# EAGLE board SparkFun-Blynk-Board-ESP8266_Panel_v10 (EAGLE 7.5.0), part 1 of 7
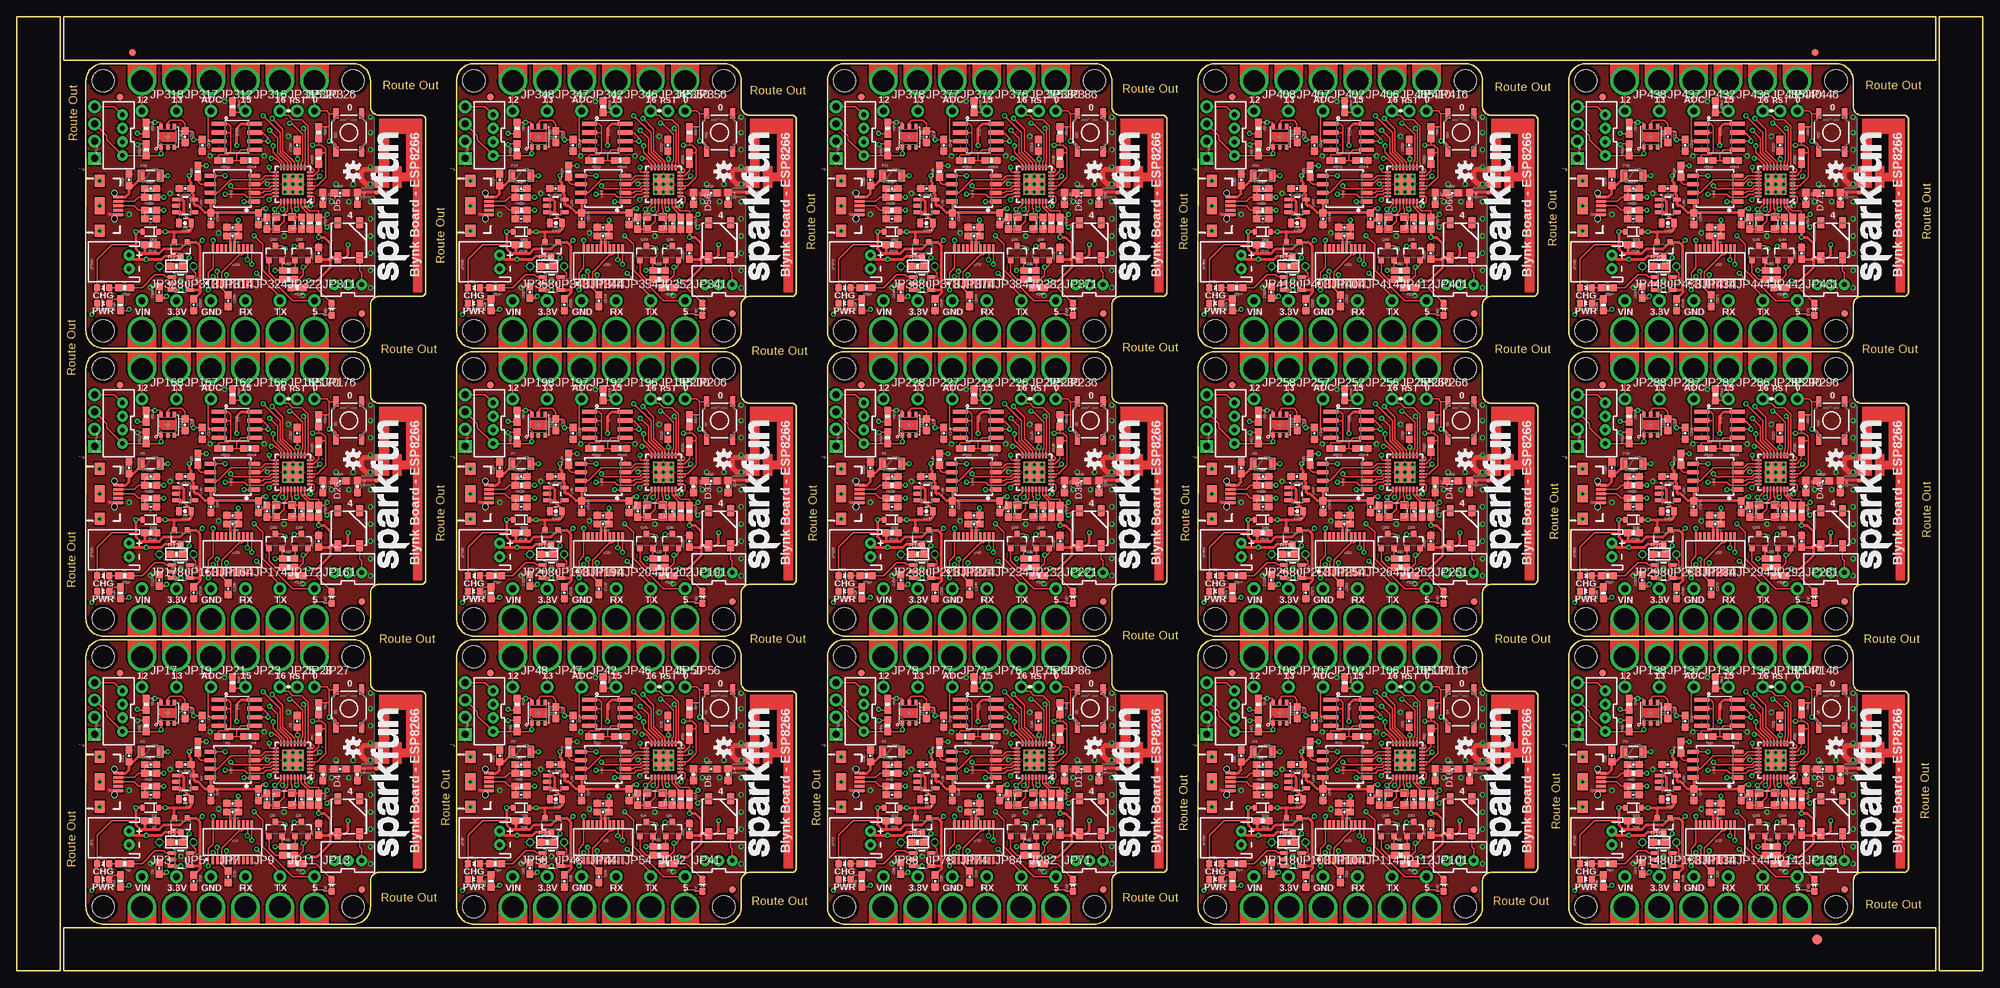
[diagram p0: board, top side]
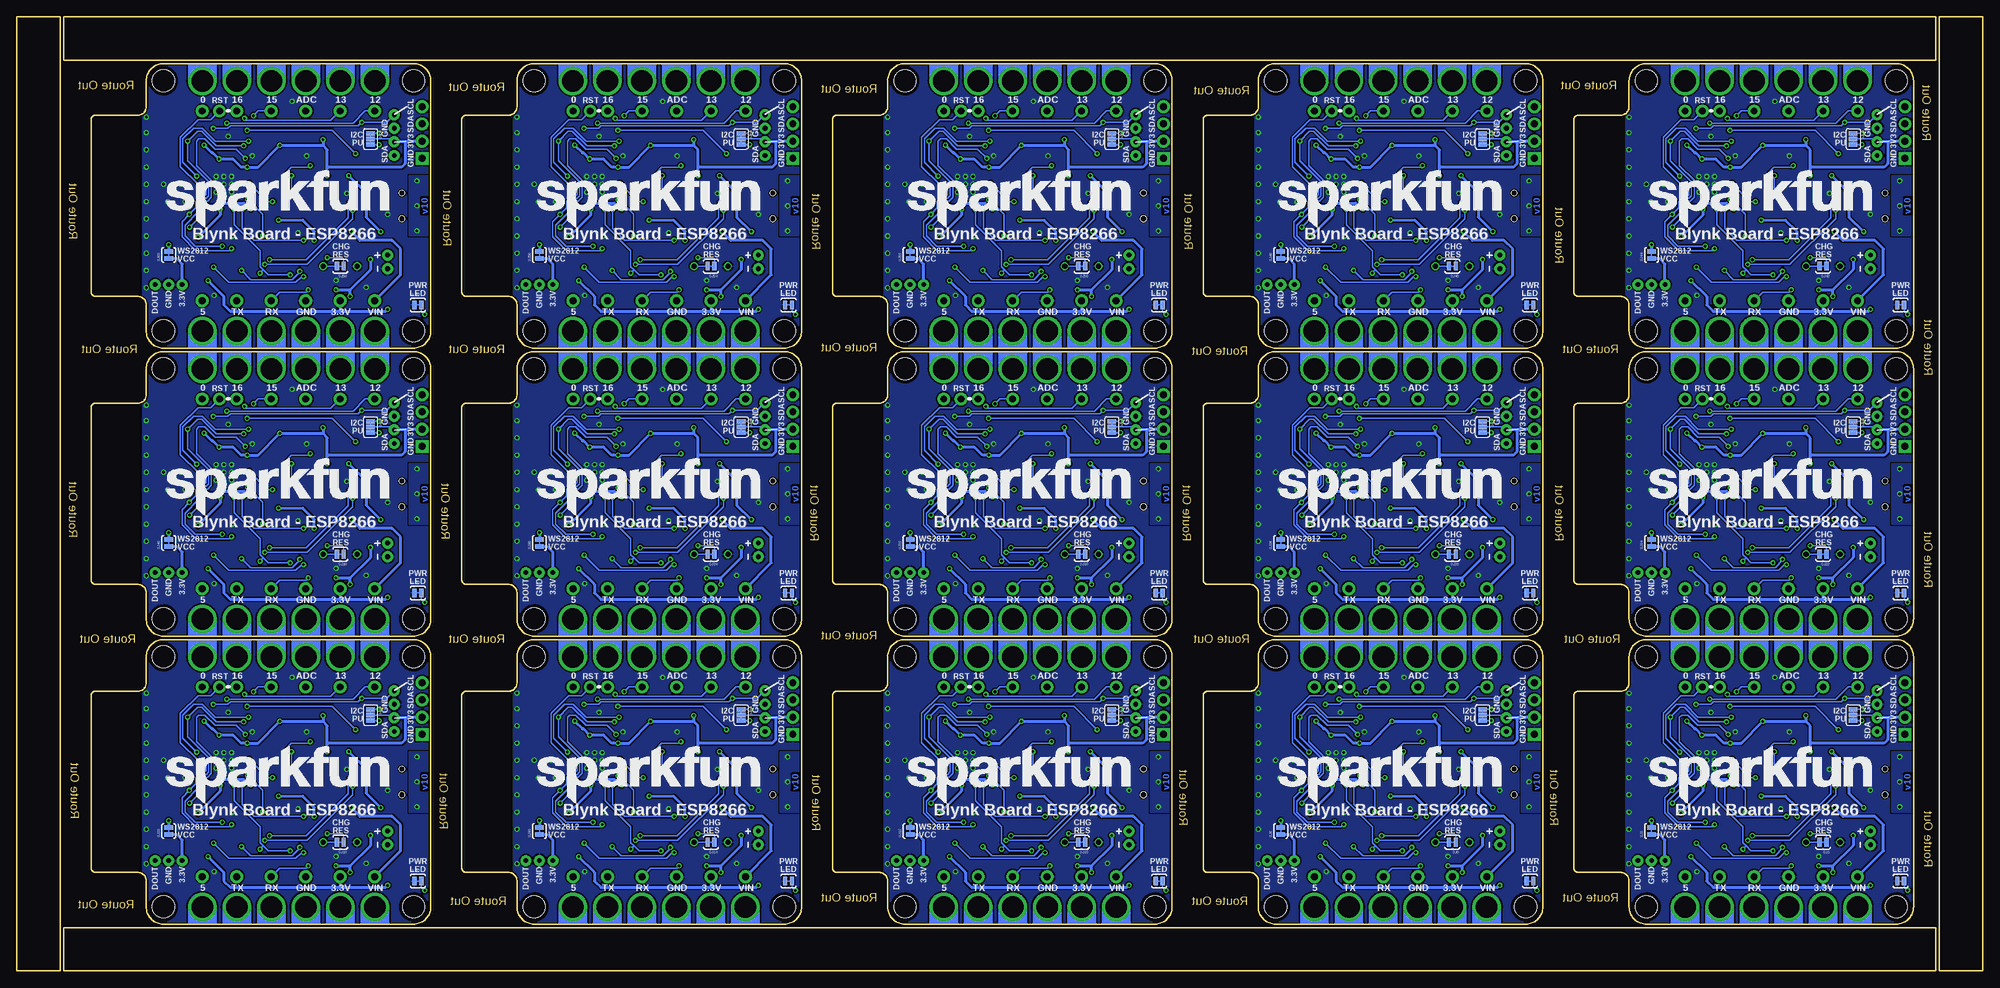
[diagram p1: board, bottom side, seen from below]

Size 289.56 x 140.46 mm. Coordinates in mm from the lower left corner, seen from the top.
Outline: 264 segments
Copper layers (1*16): Top 0.035mm / dielectric 1.5mm / Bottom 0.035mm
Design rules "SparkFun-2-layer-TIGHT": minimum track width 7mil, minimum drill 15mil, track to track 7mil, track to pad 7mil, pad to pad 7mil, via to via 7mil, smd to smd 7mil, copper to edge 7mil, drill to drill 7mil, minimum pad ring 7mil, minimum via ring 7mil, stop-mask expansion 4mil, vias tented up to drill 20mil, thermal gap 10mil

## Footprints (pad centres in the part's own frame; a part is rotated, then mirrored left to right if it is on the bottom)
0603-CAP = smd 1.1 x 1: 1 -0.85,0; 2 0.85,0
0805-CAP = smd 0.8 x 1.2: 1 -0.9,0; 2 0.9,0
LED-0603 = smd 1 x 1: A 0,-0.877; C 0,0.877
SOD-323 = smd 0.63 x 0.83: A 1.15,0; C -1.15,0
WS2812B = smd 1.651 x 1: 1 -2.577,1.6; 2 -2.577,-1.6; 3 2.577,-1.6; 4 2.577,1.6
TRACE_ANTENNA_2.4GHZ_25.7MM = smd 0.46 x 0.46: ANT 0,0.23 | smd 1 x 0.46: GND -1.18,0.23; GND2 -3.38,0.23
FIDUCIAL-1.5X3 = smd 1.5 x 1.5: 1 0,0
FIDUCIAL-1X2 = smd 1 x 1: 1 0,0
PTC-1206 = smd 1 x 1.8: 1 -1.4,0; 2 1.4,0
SO08 = smd 0.61 x 2.21: 1 -1.905,-2.616; 2 -0.635,-2.616; 3 0.635,-2.616; 4 1.905,-2.616; 5 1.905,2.616; 6 0.635,2.616; 7 -0.635,2.616; 8 -1.905,2.616
JST-2-PTH = drill 0.7 pad 1.6: 1 -1,0; 2 1,0
1X01_ALLIGATOR_3MM_HALF = drill 3.175: 1@2 0,0
1X01_NO_SILK = drill 1.016 pad 1.88: 1 0,0
JST-3-PTH-VERT = drill 0.7 pad 1.6: 1 -2,-0.55; 2 0,-0.55; 3 2,-0.55
USB-B-MICRO-SMD_V03 = smd 1.45 x 0.4: D+ 2.725,0; D- 2.725,0.65; GND 2.725,-1.3; ID 2.725,-0.65; VBUS 2.725,1.3 | smd 1.5 x 1.8: SHIELD1 0,3.685; SHIELD2 0,-3.685 | smd 1.5 x 2.5: SHIELD3 0,0 | hole 0.85: 2.2,1.9; 2.2,-1.9
JST-4-PTH-VERT = drill 0.7 pad 1.6: 1 -3,-0.55; 2 -1,-0.55; 3 1,-0.55; 4 3,-0.55
1X04_NO_SILK = drill 1.016 pad 1.88 square: 1 0,0 | drill 1.016 pad 1.88: 2 2.54,0; 3 5.08,0; 4 7.62,0
0603 = smd 1.1 x 1: 1 -0.85,0; 2 0.85,0
SOT23-3 = smd 0.8 x 0.9: 1 -0.95,-1; 2 0.95,-1; 3 0,1.1
SOT23-3@1 = smd 0.8 x 0.9: 1 -0.95,-1; 2 0.95,-1; 3 0,1.1
0603-RES = smd 1.1 x 1: 1 -0.85,0; 2 0.85,0
1/6W-RES = drill 0.762: 1 -2.5,0; 2 2.5,0
0603-RES@1 = smd 1.1 x 1: 1 -0.85,0; 2 0.85,0
TACTILE-SWITCH-SMD = smd 1.524 x 0.762: 1 -2.794,1.905; 2 2.794,1.905; 3 -2.794,-1.905; 4 2.794,-1.905
PAD-JUMPER-2-NC_BY_TRACE_YES_SILK = smd 0.635 x 1.27: 1 -0.508,0; 2 0.508,0
PAD-JUMPER-3-3OF3_NC_BY_TRACE_YES_SILK_FULL_BOX = smd 0.635 x 1.27: 1 -0.813,0; 2 0,0; 3 0.813,0
STAND-OFF = hole 3.302: 0,0
SOT23-5 = smd 0.55 x 1.2: 1 -0.95,-1.3; 2 0,-1.3; 3 0.95,-1.3; 4 0.95,1.3; 5 -0.95,1.3
QFN32 = smd 0.8 x 0.285: 1 -2.5,1.75; 2 -2.5,1.25; 3 -2.5,0.75; 4 -2.5,0.25; 5 -2.5,-0.25; 6 -2.5,-0.75; 7 -2.5,-1.25; 8 -2.5,-1.75; 17 2.5,-1.75; 18 2.5,-1.25; 19 2.5,-0.75; 20 2.5,-0.25; 21 2.5,0.25; 22 2.5,0.75; 23 2.5,1.25; 24 2.5,1.75 | smd 0.285 x 0.8: 9 -1.75,-2.5; 10 -1.25,-2.5; 11 -0.75,-2.5; 12 -0.25,-2.5; 13 0.25,-2.5; 14 0.75,-2.5; 15 1.25,-2.5; 16 1.75,-2.5; 25 1.75,2.5; 26 1.25,2.5; 27 0.75,2.5; 28 0.25,2.5; 29 -0.25,2.5; 30 -0.75,2.5; 31 -1.25,2.5; 32 -1.75,2.5 | smd 3.15 x 3.15: EP 0,0
SSOP20_L = smd 0.381 x 1.143: 1 -2.857,-2.68; 2 -2.223,-2.68; 3 -1.587,-2.68; 4 -0.953,-2.68; 5 -0.318,-2.68; 6 0.318,-2.68; 7 0.953,-2.68; 8 1.587,-2.68; 9 2.223,-2.68; 10 2.857,-2.68; 11 2.857,2.68; 12 2.223,2.68; 13 1.587,2.68; 14 0.953,2.68; 15 0.318,2.68; 16 -0.318,2.68; 17 -0.953,2.68; 18 -1.587,2.68; 19 -2.223,2.68; 20 -2.857,2.68
SOIC-8 = smd 0.61 x 1.702: 1 -1.905,-3.251; 2 -0.635,-3.251; 3 0.635,-3.251; 4 1.905,-3.251; 5 1.905,3.251; 6 0.635,3.251; 7 -0.635,3.251; 8 -1.905,3.251
SI7021 = smd 0.2 x 0.2: 7 0,0 | smd 0.8 x 0.5: DATA 1.5,-1; GND 1.5,0; NC@3 1.5,1; NC@4 -1.5,1; SCK -1.5,-1; VDD -1.5,0
CRYSTAL-SMD-3.2X2.5 = smd 1.2 x 1.1: 1 -1.175,-0.875; 2 1.175,-0.875; 3 1.175,0.875; 4 -1.175,0.875

## Placement (x,y rotation side)
C1  10uF  [0603-CAP]  35.56,25.91 270 top
C2  0.1uF  [0603-CAP]  41.27,36.7 90 top
C3  10pF  [0603-CAP]  36.83,25.27 270 top
C4  10pF  [0603-CAP]  41.91,25.27 90 top
C5  0.1uF  [0603-CAP]  27.3,36.7 270 top
C6  4.7uF  [0603-CAP]  20.95,15.11 90 top
C7  1.0uF  [0805-CAP]  24.77,25.27 180 top
C8  5.6pF  [0603-CAP]  47.62,29.72 0 top
C9  0.1uF  [0603-CAP]  44.45,20.83 90 top
C10  2.2uF  [0603-CAP]  24.77,30.35 180 top
C11  0.1uF  [0603-CAP]  16.51,31.62 90 top
C12  47pF  [0603-CAP]  19.68,30.35 0 top
C13  47pF  [0603-CAP]  19.68,25.91 0 top
C14  0.1uF  [0603-CAP]  31.75,23.37 180 top
C15  4.7uF  [0603-CAP]  31.75,24.64 180 top
C16  0.1uF  [0603-CAP]  31.11,13.84 270 top
C17  0.1uF  [0603-CAP]  28.57,25.91 270 top
C18  0.1uF  [0603-CAP]  24.77,37.97 270 top
C19  4.7uF  [0603-CAP]  26.04,13.21 270 top
C20  10uF  [0603-CAP]  90.17,25.91 270 top
C21  0.1uF  [0603-CAP]  83.19,25.91 270 top
C22  47pF  [0603-CAP]  74.3,25.91 0 top
C23  0.1uF  [0603-CAP]  86.36,23.37 180 top
C24  0.1uF  [0603-CAP]  85.72,13.84 270 top
C25  0.1uF  [0603-CAP]  95.89,36.7 90 top
C26  10pF  [0603-CAP]  91.44,25.27 270 top
C27  10pF  [0603-CAP]  96.52,25.27 90 top
C28  5.6pF  [0603-CAP]  102.23,29.72 0 top
C29  0.1uF  [0603-CAP]  71.12,31.62 90 top
C30  47pF  [0603-CAP]  74.3,30.35 0 top
C31  4.7uF  [0603-CAP]  86.36,24.64 180 top
C32  0.1uF  [0603-CAP]  79.38,37.97 270 top
C33  0.1uF  [0603-CAP]  99.06,20.83 90 top
C34  0.1uF  [0603-CAP]  81.92,36.7 270 top
C35  1.0uF  [0805-CAP]  79.38,25.27 180 top
C36  2.2uF  [0603-CAP]  79.38,30.35 180 top
C37  4.7uF  [0603-CAP]  75.56,15.11 90 top
C38  4.7uF  [0603-CAP]  80.64,13.21 270 top
C39  10uF  [0603-CAP]  144.78,25.91 270 top
C40  0.1uF  [0603-CAP]  137.79,25.91 270 top
C41  47pF  [0603-CAP]  128.91,25.91 0 top
C42  0.1uF  [0603-CAP]  140.97,23.37 180 top
C43  0.1uF  [0603-CAP]  140.34,13.84 270 top
C44  0.1uF  [0603-CAP]  150.5,36.7 90 top
C45  10pF  [0603-CAP]  146.05,25.27 270 top
C46  10pF  [0603-CAP]  151.13,25.27 90 top
C47  5.6pF  [0603-CAP]  156.84,29.72 0 top
C48  0.1uF  [0603-CAP]  125.73,31.62 90 top
C49  47pF  [0603-CAP]  128.91,30.35 0 top
C50  4.7uF  [0603-CAP]  140.97,24.64 180 top
C51  0.1uF  [0603-CAP]  133.99,37.97 270 top
C52  0.1uF  [0603-CAP]  153.67,20.83 90 top
C53  0.1uF  [0603-CAP]  136.53,36.7 270 top
C54  1.0uF  [0805-CAP]  133.99,25.27 180 top
C55  2.2uF  [0603-CAP]  133.99,30.35 180 top
C56  4.7uF  [0603-CAP]  130.18,15.11 90 top
C57  4.7uF  [0603-CAP]  135.25,13.21 270 top
C58  10uF  [0603-CAP]  199.39,25.91 270 top
C59  0.1uF  [0603-CAP]  192.41,25.91 270 top
C60  47pF  [0603-CAP]  183.51,25.91 0 top
C61  0.1uF  [0603-CAP]  195.58,23.37 180 top
C62  0.1uF  [0603-CAP]  194.94,13.84 270 top
C63  0.1uF  [0603-CAP]  205.1,36.7 90 top
C64  10pF  [0603-CAP]  200.66,25.27 270 top
C65  10pF  [0603-CAP]  205.74,25.27 90 top
C66  5.6pF  [0603-CAP]  211.46,29.72 0 top
C67  0.1uF  [0603-CAP]  180.34,31.62 90 top
C68  47pF  [0603-CAP]  183.51,30.35 0 top
C69  4.7uF  [0603-CAP]  195.58,24.64 180 top
C70  0.1uF  [0603-CAP]  188.59,37.97 270 top
C71  0.1uF  [0603-CAP]  208.28,20.83 90 top
C72  0.1uF  [0603-CAP]  191.13,36.7 270 top
C73  1.0uF  [0805-CAP]  188.59,25.27 180 top
C74  2.2uF  [0603-CAP]  188.59,30.35 180 top
C75  4.7uF  [0603-CAP]  184.78,15.11 90 top
C76  4.7uF  [0603-CAP]  189.87,13.21 270 top
C77  10uF  [0603-CAP]  254,25.91 270 top
C78  0.1uF  [0603-CAP]  247.01,25.91 270 top
C79  47pF  [0603-CAP]  238.12,25.91 0 top
C80  0.1uF  [0603-CAP]  250.19,23.37 180 top
C81  0.1uF  [0603-CAP]  249.56,13.84 270 top
C82  0.1uF  [0603-CAP]  259.71,36.7 90 top
C83  10pF  [0603-CAP]  255.27,25.27 270 top
C84  10pF  [0603-CAP]  260.35,25.27 90 top
C85  5.6pF  [0603-CAP]  266.06,29.72 0 top
C86  0.1uF  [0603-CAP]  234.95,31.62 90 top
C87  47pF  [0603-CAP]  238.12,30.35 0 top
C88  4.7uF  [0603-CAP]  250.19,24.64 180 top
C89  0.1uF  [0603-CAP]  243.21,37.97 270 top
C90  0.1uF  [0603-CAP]  262.89,20.83 90 top
C91  0.1uF  [0603-CAP]  245.75,36.7 270 top
C92  1.0uF  [0805-CAP]  243.21,25.27 180 top
C93  2.2uF  [0603-CAP]  243.21,30.35 180 top
C94  4.7uF  [0603-CAP]  239.4,15.11 90 top
C95  4.7uF  [0603-CAP]  244.47,13.21 270 top
C96  10uF  [0603-CAP]  35.56,68.33 270 top
C97  0.1uF  [0603-CAP]  28.57,68.33 270 top
C98  47pF  [0603-CAP]  19.68,68.33 0 top
C99  0.1uF  [0603-CAP]  31.75,65.79 180 top
C100  0.1uF  [0603-CAP]  31.11,56.26 270 top
C101  0.1uF  [0603-CAP]  41.27,79.12 90 top
C102  10pF  [0603-CAP]  36.83,67.69 270 top
C103  10pF  [0603-CAP]  41.91,67.69 90 top
C104  5.6pF  [0603-CAP]  47.62,72.14 0 top
C105  0.1uF  [0603-CAP]  16.51,74.04 90 top
C106  47pF  [0603-CAP]  19.68,72.77 0 top
C107  4.7uF  [0603-CAP]  31.75,67.06 180 top
C108  0.1uF  [0603-CAP]  24.77,80.39 270 top
C109  0.1uF  [0603-CAP]  44.45,63.25 90 top
C110  0.1uF  [0603-CAP]  27.3,79.12 270 top
C111  1.0uF  [0805-CAP]  24.77,67.69 180 top
C112  2.2uF  [0603-CAP]  24.77,72.77 180 top
C113  4.7uF  [0603-CAP]  20.95,57.53 90 top
C114  4.7uF  [0603-CAP]  26.04,55.63 270 top
C115  10uF  [0603-CAP]  90.17,68.33 270 top
C116  0.1uF  [0603-CAP]  83.19,68.33 270 top
C117  47pF  [0603-CAP]  74.3,68.33 0 top
C118  0.1uF  [0603-CAP]  86.36,65.79 180 top
C119  0.1uF  [0603-CAP]  85.72,56.26 270 top
C120  0.1uF  [0603-CAP]  95.89,79.12 90 top
C121  10pF  [0603-CAP]  91.44,67.69 270 top
C122  10pF  [0603-CAP]  96.52,67.69 90 top
C123  5.6pF  [0603-CAP]  102.23,72.14 0 top
C124  0.1uF  [0603-CAP]  71.12,74.04 90 top
C125  47pF  [0603-CAP]  74.3,72.77 0 top
C126  4.7uF  [0603-CAP]  86.36,67.06 180 top
C127  0.1uF  [0603-CAP]  79.38,80.39 270 top
C128  0.1uF  [0603-CAP]  99.06,63.25 90 top
C129  0.1uF  [0603-CAP]  81.92,79.12 270 top
C130  1.0uF  [0805-CAP]  79.38,67.69 180 top
C131  2.2uF  [0603-CAP]  79.38,72.77 180 top
C132  4.7uF  [0603-CAP]  75.56,57.53 90 top
C133  4.7uF  [0603-CAP]  80.64,55.63 270 top
C134  10uF  [0603-CAP]  144.78,68.33 270 top
C135  0.1uF  [0603-CAP]  137.79,68.33 270 top
C136  47pF  [0603-CAP]  128.91,68.33 0 top
C137  0.1uF  [0603-CAP]  140.97,65.79 180 top
C138  0.1uF  [0603-CAP]  140.34,56.26 270 top
C139  0.1uF  [0603-CAP]  150.5,79.12 90 top
C140  10pF  [0603-CAP]  146.05,67.69 270 top
C141  10pF  [0603-CAP]  151.13,67.69 90 top
C142  5.6pF  [0603-CAP]  156.84,72.14 0 top
C143  0.1uF  [0603-CAP]  125.73,74.04 90 top
C144  47pF  [0603-CAP]  128.91,72.77 0 top
C145  4.7uF  [0603-CAP]  140.97,67.06 180 top
C146  0.1uF  [0603-CAP]  133.99,80.39 270 top
C147  0.1uF  [0603-CAP]  153.67,63.25 90 top
C148  0.1uF  [0603-CAP]  136.53,79.12 270 top
C149  1.0uF  [0805-CAP]  133.99,67.69 180 top
C150  2.2uF  [0603-CAP]  133.99,72.77 180 top
C151  4.7uF  [0603-CAP]  130.18,57.53 90 top
C152  4.7uF  [0603-CAP]  135.25,55.63 270 top
C153  10uF  [0603-CAP]  199.39,68.33 270 top
C154  0.1uF  [0603-CAP]  192.41,68.33 270 top
C155  47pF  [0603-CAP]  183.51,68.33 0 top
C156  0.1uF  [0603-CAP]  195.58,65.79 180 top
C157  0.1uF  [0603-CAP]  194.94,56.26 270 top
C158  0.1uF  [0603-CAP]  205.1,79.12 90 top
C159  10pF  [0603-CAP]  200.66,67.69 270 top
C160  10pF  [0603-CAP]  205.74,67.69 90 top
C161  5.6pF  [0603-CAP]  211.46,72.14 0 top
C162  0.1uF  [0603-CAP]  180.34,74.04 90 top
C163  47pF  [0603-CAP]  183.51,72.77 0 top
C164  4.7uF  [0603-CAP]  195.58,67.06 180 top
C165  0.1uF  [0603-CAP]  188.59,80.39 270 top
C166  0.1uF  [0603-CAP]  208.28,63.25 90 top
C167  0.1uF  [0603-CAP]  191.13,79.12 270 top
C168  1.0uF  [0805-CAP]  188.59,67.69 180 top
C169  2.2uF  [0603-CAP]  188.59,72.77 180 top
C170  4.7uF  [0603-CAP]  184.78,57.53 90 top
C171  4.7uF  [0603-CAP]  189.87,55.63 270 top
C172  10uF  [0603-CAP]  254,68.33 270 top
C173  0.1uF  [0603-CAP]  247.01,68.33 270 top
C174  47pF  [0603-CAP]  238.12,68.33 0 top
C175  0.1uF  [0603-CAP]  250.19,65.79 180 top
C176  0.1uF  [0603-CAP]  249.56,56.26 270 top
C177  0.1uF  [0603-CAP]  259.71,79.12 90 top
C178  10pF  [0603-CAP]  255.27,67.69 270 top
C179  10pF  [0603-CAP]  260.35,67.69 90 top
C180  5.6pF  [0603-CAP]  266.06,72.14 0 top
C181  0.1uF  [0603-CAP]  234.95,74.04 90 top
C182  47pF  [0603-CAP]  238.12,72.77 0 top
C183  4.7uF  [0603-CAP]  250.19,67.06 180 top
C184  0.1uF  [0603-CAP]  243.21,80.39 270 top
C185  0.1uF  [0603-CAP]  262.89,63.25 90 top
C186  0.1uF  [0603-CAP]  245.75,79.12 270 top
C187  1.0uF  [0805-CAP]  243.21,67.69 180 top
C188  2.2uF  [0603-CAP]  243.21,72.77 180 top
C189  4.7uF  [0603-CAP]  239.4,57.53 90 top
C190  4.7uF  [0603-CAP]  244.47,55.63 270 top
C191  10uF  [0603-CAP]  35.56,110.74 270 top
C192  0.1uF  [0603-CAP]  28.57,110.74 270 top
C193  47pF  [0603-CAP]  19.68,110.74 0 top
C194  0.1uF  [0603-CAP]  31.75,108.2 180 top
C195  0.1uF  [0603-CAP]  31.11,98.68 270 top
C196  0.1uF  [0603-CAP]  41.27,121.54 90 top
C197  10pF  [0603-CAP]  36.83,110.11 270 top
C198  10pF  [0603-CAP]  41.91,110.11 90 top
C199  5.6pF  [0603-CAP]  47.62,114.55 0 top
C200  0.1uF  [0603-CAP]  16.51,116.46 90 top
C201  47pF  [0603-CAP]  19.68,115.19 0 top
C202  4.7uF  [0603-CAP]  31.75,109.47 180 top
C203  0.1uF  [0603-CAP]  24.77,122.81 270 top
C204  0.1uF  [0603-CAP]  44.45,105.66 90 top
C205  0.1uF  [0603-CAP]  27.3,121.54 270 top
C206  1.0uF  [0805-CAP]  24.77,110.11 180 top
C207  2.2uF  [0603-CAP]  24.77,115.19 180 top
C208  4.7uF  [0603-CAP]  20.95,99.95 90 top
C209  4.7uF  [0603-CAP]  26.04,98.04 270 top
C210  10uF  [0603-CAP]  90.17,110.74 270 top
C211  0.1uF  [0603-CAP]  83.19,110.74 270 top
C212  47pF  [0603-CAP]  74.3,110.74 0 top
C213  0.1uF  [0603-CAP]  86.36,108.2 180 top
C214  0.1uF  [0603-CAP]  85.72,98.68 270 top
C215  0.1uF  [0603-CAP]  95.89,121.54 90 top
C216  10pF  [0603-CAP]  91.44,110.11 270 top
C217  10pF  [0603-CAP]  96.52,110.11 90 top
C218  5.6pF  [0603-CAP]  102.23,114.55 0 top
C219  0.1uF  [0603-CAP]  71.12,116.46 90 top
C220  47pF  [0603-CAP]  74.3,115.19 0 top
C221  4.7uF  [0603-CAP]  86.36,109.47 180 top
C222  0.1uF  [0603-CAP]  79.38,122.81 270 top
C223  0.1uF  [0603-CAP]  99.06,105.66 90 top
C224  0.1uF  [0603-CAP]  81.92,121.54 270 top
C225  1.0uF  [0805-CAP]  79.38,110.11 180 top
C226  2.2uF  [0603-CAP]  79.38,115.19 180 top
C227  4.7uF  [0603-CAP]  75.56,99.95 90 top
C228  4.7uF  [0603-CAP]  80.64,98.04 270 top
C229  10uF  [0603-CAP]  144.78,110.74 270 top
C230  0.1uF  [0603-CAP]  137.79,110.74 270 top
C231  47pF  [0603-CAP]  128.91,110.74 0 top
C232  0.1uF  [0603-CAP]  140.97,108.2 180 top
C233  0.1uF  [0603-CAP]  140.34,98.68 270 top
C234  0.1uF  [0603-CAP]  150.5,121.54 90 top
C235  10pF  [0603-CAP]  146.05,110.11 270 top
C236  10pF  [0603-CAP]  151.13,110.11 90 top
C237  5.6pF  [0603-CAP]  156.84,114.55 0 top
C238  0.1uF  [0603-CAP]  125.73,116.46 90 top
C239  47pF  [0603-CAP]  128.91,115.19 0 top
C240  4.7uF  [0603-CAP]  140.97,109.47 180 top
C241  0.1uF  [0603-CAP]  133.99,122.81 270 top
C242  0.1uF  [0603-CAP]  153.67,105.66 90 top
C243  0.1uF  [0603-CAP]  136.53,121.54 270 top
C244  1.0uF  [0805-CAP]  133.99,110.11 180 top
C245  2.2uF  [0603-CAP]  133.99,115.19 180 top
C246  4.7uF  [0603-CAP]  130.18,99.95 90 top
C247  4.7uF  [0603-CAP]  135.25,98.04 270 top
C248  10uF  [0603-CAP]  199.39,110.74 270 top
C249  0.1uF  [0603-CAP]  192.41,110.74 270 top
C250  47pF  [0603-CAP]  183.51,110.74 0 top
C251  0.1uF  [0603-CAP]  195.58,108.2 180 top
C252  0.1uF  [0603-CAP]  194.94,98.68 270 top
C253  0.1uF  [0603-CAP]  205.1,121.54 90 top
C254  10pF  [0603-CAP]  200.66,110.11 270 top
C255  10pF  [0603-CAP]  205.74,110.11 90 top
C256  5.6pF  [0603-CAP]  211.46,114.55 0 top
C257  0.1uF  [0603-CAP]  180.34,116.46 90 top
C258  47pF  [0603-CAP]  183.51,115.19 0 top
C259  4.7uF  [0603-CAP]  195.58,109.47 180 top
C260  0.1uF  [0603-CAP]  188.59,122.81 270 top
C261  0.1uF  [0603-CAP]  208.28,105.66 90 top
C262  0.1uF  [0603-CAP]  191.13,121.54 270 top
C263  1.0uF  [0805-CAP]  188.59,110.11 180 top
C264  2.2uF  [0603-CAP]  188.59,115.19 180 top
C265  4.7uF  [0603-CAP]  184.78,99.95 90 top
C266  4.7uF  [0603-CAP]  189.87,98.04 270 top
C267  10uF  [0603-CAP]  254,110.74 270 top
C268  0.1uF  [0603-CAP]  247.01,110.74 270 top
C269  47pF  [0603-CAP]  238.12,110.74 0 top
C270  0.1uF  [0603-CAP]  250.19,108.2 180 top
C271  0.1uF  [0603-CAP]  249.56,98.68 270 top
C272  0.1uF  [0603-CAP]  259.71,121.54 90 top
C273  10pF  [0603-CAP]  255.27,110.11 270 top
C274  10pF  [0603-CAP]  260.35,110.11 90 top
C275  5.6pF  [0603-CAP]  266.06,114.55 0 top
C276  0.1uF  [0603-CAP]  234.95,116.46 90 top
C277  47pF  [0603-CAP]  238.12,115.19 0 top
C278  4.7uF  [0603-CAP]  250.19,109.47 180 top
C279  0.1uF  [0603-CAP]  243.21,122.81 270 top
C280  0.1uF  [0603-CAP]  262.89,105.66 90 top
C281  0.1uF  [0603-CAP]  245.75,121.54 270 top
C282  1.0uF  [0805-CAP]  243.21,110.11 180 top
C283  2.2uF  [0603-CAP]  243.21,115.19 180 top
C284  4.7uF  [0603-CAP]  239.4,99.95 90 top
C285  4.7uF  [0603-CAP]  244.47,98.04 270 top
D1  Yellow  [LED-0603]  12.7,15.75 270 top
D2  BAT20J  [SOD-323]  19.68,24 180 top
D3  BLUE  [LED-0603]  46.35,12.57 0 top
D4  WS2812  [WS2812B]  48.9,22.73 90 top
D5  RED  [LED-0603]  12.7,13.46 90 top
D6  WS2812  [WS2812B]  103.5,22.73 90 top
D7  BLUE  [LED-0603]  100.97,12.57 0 top
D8  BAT20J  [SOD-323]  74.3,24 180 top
D9  Yellow  [LED-0603]  67.31,15.75 270 top
D10  RED  [LED-0603]  67.31,13.46 90 top
D11  WS2812  [WS2812B]  158.12,22.73 90 top
D12  BLUE  [LED-0603]  155.57,12.57 0 top
D13  BAT20J  [SOD-323]  128.91,24 180 top
D14  Yellow  [LED-0603]  121.92,15.75 270 top
D15  RED  [LED-0603]  121.92,13.46 90 top
D16  WS2812  [WS2812B]  212.72,22.73 90 top
D17  BLUE  [LED-0603]  210.19,12.57 0 top
D18  BAT20J  [SOD-323]  183.51,24 180 top
D19  Yellow  [LED-0603]  176.53,15.75 270 top
D20  RED  [LED-0603]  176.53,13.46 90 top
D21  WS2812  [WS2812B]  267.33,22.73 90 top
D22  BLUE  [LED-0603]  264.8,12.57 0 top
D23  BAT20J  [SOD-323]  238.12,24 180 top
D24  Yellow  [LED-0603]  231.14,15.75 270 top
D25  RED  [LED-0603]  231.14,13.46 90 top
D26  WS2812  [WS2812B]  48.9,65.15 90 top
D27  BLUE  [LED-0603]  46.35,54.99 0 top
D28  BAT20J  [SOD-323]  19.68,66.42 180 top
D29  Yellow  [LED-0603]  12.7,58.17 270 top
D30  RED  [LED-0603]  12.7,55.88 90 top
D31  WS2812  [WS2812B]  103.5,65.15 90 top
D32  BLUE  [LED-0603]  100.97,54.99 0 top
D33  BAT20J  [SOD-323]  74.3,66.42 180 top
D34  Yellow  [LED-0603]  67.31,58.17 270 top
D35  RED  [LED-0603]  67.31,55.88 90 top
D36  WS2812  [WS2812B]  158.12,65.15 90 top
D37  BLUE  [LED-0603]  155.57,54.99 0 top
D38  BAT20J  [SOD-323]  128.91,66.42 180 top
D39  Yellow  [LED-0603]  121.92,58.17 270 top
D40  RED  [LED-0603]  121.92,55.88 90 top
D41  WS2812  [WS2812B]  212.72,65.15 90 top
D42  BLUE  [LED-0603]  210.19,54.99 0 top
D43  BAT20J  [SOD-323]  183.51,66.42 180 top
D44  Yellow  [LED-0603]  176.53,58.17 270 top
D45  RED  [LED-0603]  176.53,55.88 90 top
D46  WS2812  [WS2812B]  267.33,65.15 90 top
D47  BLUE  [LED-0603]  264.8,54.99 0 top
D48  BAT20J  [SOD-323]  238.12,66.42 180 top
D49  Yellow  [LED-0603]  231.14,58.17 270 top
D50  RED  [LED-0603]  231.14,55.88 90 top
D51  WS2812  [WS2812B]  48.9,107.57 90 top
D52  BLUE  [LED-0603]  46.35,97.41 0 top
D53  BAT20J  [SOD-323]  19.68,108.84 180 top
D54  Yellow  [LED-0603]  12.7,100.58 270 top
D55  RED  [LED-0603]  12.7,98.3 90 top
D56  WS2812  [WS2812B]  103.5,107.57 90 top
D57  BLUE  [LED-0603]  100.97,97.41 0 top
D58  BAT20J  [SOD-323]  74.3,108.84 180 top
D59  Yellow  [LED-0603]  67.31,100.58 270 top
D60  RED  [LED-0603]  67.31,98.3 90 top
D61  WS2812  [WS2812B]  158.12,107.57 90 top
D62  BLUE  [LED-0603]  155.57,97.41 0 top
D63  BAT20J  [SOD-323]  128.91,108.84 180 top
D64  Yellow  [LED-0603]  121.92,100.58 270 top
D65  RED  [LED-0603]  121.92,98.3 90 top
D66  WS2812  [WS2812B]  212.72,107.57 90 top
D67  BLUE  [LED-0603]  210.19,97.41 0 top
D68  BAT20J  [SOD-323]  183.51,108.84 180 top
D69  Yellow  [LED-0603]  176.53,100.58 270 top
D70  RED  [LED-0603]  176.53,98.3 90 top
D71  WS2812  [WS2812B]  267.33,107.57 90 top
D72  BLUE  [LED-0603]  264.8,97.41 0 top
D73  BAT20J  [SOD-323]  238.12,108.84 180 top
D74  Yellow  [LED-0603]  231.14,100.58 270 top
D75  RED  [LED-0603]  231.14,98.3 90 top
E1  ANTENNATRACE  [TRACE_ANTENNA_2.4GHZ_25.7MM]  52.7,29.78 270 top
E2  ANTENNATRACE  [TRACE_ANTENNA_2.4GHZ_25.7MM]  107.31,29.78 270 top
E3  ANTENNATRACE  [TRACE_ANTENNA_2.4GHZ_25.7MM]  161.93,29.78 270 top
E4  ANTENNATRACE  [TRACE_ANTENNA_2.4GHZ_25.7MM]  216.53,29.78 270 top
E5  ANTENNATRACE  [TRACE_ANTENNA_2.4GHZ_25.7MM]  271.14,29.78 270 top
E6  ANTENNATRACE  [TRACE_ANTENNA_2.4GHZ_25.7MM]  52.7,72.2 270 top
E7  ANTENNATRACE  [TRACE_ANTENNA_2.4GHZ_25.7MM]  107.31,72.2 270 top
E8  ANTENNATRACE  [TRACE_ANTENNA_2.4GHZ_25.7MM]  161.93,72.2 270 top
E9  ANTENNATRACE  [TRACE_ANTENNA_2.4GHZ_25.7MM]  216.53,72.2 270 top
E10  ANTENNATRACE  [TRACE_ANTENNA_2.4GHZ_25.7MM]  271.14,72.2 270 top
E11  ANTENNATRACE  [TRACE_ANTENNA_2.4GHZ_25.7MM]  52.7,114.62 270 top
E12  ANTENNATRACE  [TRACE_ANTENNA_2.4GHZ_25.7MM]  107.31,114.62 270 top
E13  ANTENNATRACE  [TRACE_ANTENNA_2.4GHZ_25.7MM]  161.93,114.62 270 top
E14  ANTENNATRACE  [TRACE_ANTENNA_2.4GHZ_25.7MM]  216.53,114.62 270 top
E15  ANTENNATRACE  [TRACE_ANTENNA_2.4GHZ_25.7MM]  271.14,114.62 270 top
E$1  [FIDUCIAL-1.5X3]  265.18,4.57 0 top
E$7  [FIDUCIAL-1X2]  264.92,135.25 90 top
E$8  [FIDUCIAL-1X2]  17.02,135.25 270 top
F1  500mA  [PTC-1206]  19.68,32.26 0 top
F2  500mA  [PTC-1206]  74.3,32.26 0 top
F3  500mA  [PTC-1206]  128.91,32.26 0 top
F4  500mA  [PTC-1206]  183.51,32.26 0 top
F5  500mA  [PTC-1206]  238.12,32.26 0 top
F6  500mA  [PTC-1206]  19.68,74.68 0 top
F7  500mA  [PTC-1206]  74.3,74.68 0 top
F8  500mA  [PTC-1206]  128.91,74.68 0 top
F9  500mA  [PTC-1206]  183.51,74.68 0 top
F10  500mA  [PTC-1206]  238.12,74.68 0 top
F11  500mA  [PTC-1206]  19.68,117.09 0 top
F12  500mA  [PTC-1206]  74.3,117.09 0 top
F13  500mA  [PTC-1206]  128.91,117.09 0 top
F14  500mA  [PTC-1206]  183.51,117.09 0 top
F15  500mA  [PTC-1206]  238.12,117.09 0 top
FID1  FIDUCIAL1X2  [FIDUCIAL-1X2]  50.8,11.94 0 top
FID2  FIDUCIAL1X2  [FIDUCIAL-1X2]  15.16,43.86 0 top
FID3  FIDUCIAL1X2  [FIDUCIAL-1X2]  105.41,11.94 0 top
FID4  FIDUCIAL1X2  [FIDUCIAL-1X2]  69.77,43.86 0 top
FID5  FIDUCIAL1X2  [FIDUCIAL-1X2]  160.02,11.94 0 top
FID6  FIDUCIAL1X2  [FIDUCIAL-1X2]  124.38,43.86 0 top
FID7  FIDUCIAL1X2  [FIDUCIAL-1X2]  214.63,11.94 0 top
FID8  FIDUCIAL1X2  [FIDUCIAL-1X2]  178.99,43.86 0 top
FID9  FIDUCIAL1X2  [FIDUCIAL-1X2]  269.24,11.94 0 top
FID10  FIDUCIAL1X2  [FIDUCIAL-1X2]  233.6,43.86 0 top
FID11  FIDUCIAL1X2  [FIDUCIAL-1X2]  50.8,54.36 0 top
FID12  FIDUCIAL1X2  [FIDUCIAL-1X2]  15.16,86.28 0 top
FID13  FIDUCIAL1X2  [FIDUCIAL-1X2]  105.41,54.36 0 top
FID14  FIDUCIAL1X2  [FIDUCIAL-1X2]  69.77,86.28 0 top
FID15  FIDUCIAL1X2  [FIDUCIAL-1X2]  160.02,54.36 0 top
FID16  FIDUCIAL1X2  [FIDUCIAL-1X2]  124.38,86.28 0 top
FID17  FIDUCIAL1X2  [FIDUCIAL-1X2]  214.63,54.36 0 top
FID18  FIDUCIAL1X2  [FIDUCIAL-1X2]  178.99,86.28 0 top
FID19  FIDUCIAL1X2  [FIDUCIAL-1X2]  269.24,54.36 0 top
FID20  FIDUCIAL1X2  [FIDUCIAL-1X2]  233.6,86.28 0 top
FID21  FIDUCIAL1X2  [FIDUCIAL-1X2]  50.8,96.77 0 top
FID22  FIDUCIAL1X2  [FIDUCIAL-1X2]  15.16,128.69 0 top
FID23  FIDUCIAL1X2  [FIDUCIAL-1X2]  105.41,96.77 0 top
FID24  FIDUCIAL1X2  [FIDUCIAL-1X2]  69.77,128.69 0 top
FID25  FIDUCIAL1X2  [FIDUCIAL-1X2]  160.02,96.77 0 top
FID26  FIDUCIAL1X2  [FIDUCIAL-1X2]  124.38,128.69 0 top
FID27  FIDUCIAL1X2  [FIDUCIAL-1X2]  214.63,96.77 0 top
FID28  FIDUCIAL1X2  [FIDUCIAL-1X2]  178.99,128.69 0 top
FID29  FIDUCIAL1X2  [FIDUCIAL-1X2]  269.24,96.77 0 top
FID30  FIDUCIAL1X2  [FIDUCIAL-1X2]  233.6,128.69 0 top
IC1  LMV358  [SO08]  32.38,37.97 270 top
IC2  LMV358  [SO08]  87,37.97 270 top
IC3  LMV358  [SO08]  141.6,37.97 270 top
IC4  LMV358  [SO08]  196.22,37.97 270 top
IC5  LMV358  [SO08]  250.82,37.97 270 top
IC6  LMV358  [SO08]  32.38,80.39 270 top
IC7  LMV358  [SO08]  87,80.39 270 top
IC8  LMV358  [SO08]  141.6,80.39 270 top
IC9  LMV358  [SO08]  196.22,80.39 270 top
IC10  LMV358  [SO08]  250.82,80.39 270 top
IC11  LMV358  [SO08]  32.38,122.81 270 top
IC12  LMV358  [SO08]  87,122.81 270 top
IC13  LMV358  [SO08]  141.6,122.81 270 top
IC14  LMV358  [SO08]  196.22,122.81 270 top
IC15  LMV358  [SO08]  250.82,122.81 270 top
JP1  LiPo  [JST-2-PTH]  16.51,19.56 90 top
JP2  [1X01_ALLIGATOR_3MM_HALF]  18.41,9.4 180 top
JP3  [1X01_NO_SILK]  18.41,13.84 0 top
JP4  [1X01_ALLIGATOR_3MM_HALF]  23.5,9.4 180 top
JP5  [1X01_NO_SILK]  23.5,13.84 0 top
JP6  [1X01_ALLIGATOR_3MM_HALF]  28.57,9.4 180 top
JP7  [1X01_NO_SILK]  28.57,13.84 0 top
JP8  [1X01_ALLIGATOR_3MM_HALF]  33.66,9.4 180 top
JP9  [1X01_NO_SILK]  33.66,13.84 0 top
JP10  [1X01_ALLIGATOR_3MM_HALF]  38.73,9.4 180 top
JP11  [1X01_NO_SILK]  38.73,13.84 0 top
JP12  [1X01_ALLIGATOR_3MM_HALF]  43.81,9.4 180 top
JP13  [1X01_NO_SILK]  43.81,13.84 0 top
JP14  [JST-3-PTH-VERT]  48.77,16.76 0 top
JP15  [USB-B-MICRO-SMD_V03]  12.19,27.81 0 top
JP16  [1X01_ALLIGATOR_3MM_HALF]  18.41,46.23 0 top
JP17  [1X01_NO_SILK]  18.41,41.78 0 top
JP18  [1X01_ALLIGATOR_3MM_HALF]  23.5,46.23 0 top
JP19  [1X01_NO_SILK]  23.5,41.78 0 top
JP20  [1X01_ALLIGATOR_3MM_HALF]  28.57,46.23 0 top
JP21  [1X01_NO_SILK]  28.57,41.78 0 top
JP22  [1X01_ALLIGATOR_3MM_HALF]  33.66,46.23 0 top
JP23  [1X01_NO_SILK]  33.66,41.78 0 top
JP24  [1X01_ALLIGATOR_3MM_HALF]  38.73,46.23 0 top
JP25  [1X01_NO_SILK]  38.73,41.78 0 top
JP26  [1X01_ALLIGATOR_3MM_HALF]  43.81,46.23 0 top
JP27  [1X01_NO_SILK]  43.81,41.78 0 top
JP28  [1X01_NO_SILK]  41.27,41.78 0 top
JP29  [JST-4-PTH-VERT]  14.99,38.23 90 top
JP30  [1X04_NO_SILK]  11.43,34.8 90 top
JP31  [USB-B-MICRO-SMD_V03]  66.8,27.81 0 top
JP32  [1X01_ALLIGATOR_3MM_HALF]  73.03,46.23 0 top
JP33  [1X01_ALLIGATOR_3MM_HALF]  78.11,46.23 0 top
JP34  [1X01_ALLIGATOR_3MM_HALF]  88.27,46.23 0 top
JP35  [1X01_ALLIGATOR_3MM_HALF]  93.34,46.23 0 top
JP36  [1X01_ALLIGATOR_3MM_HALF]  98.42,9.4 180 top
JP37  [1X01_ALLIGATOR_3MM_HALF]  83.19,46.23 0 top
JP38  [1X01_ALLIGATOR_3MM_HALF]  78.11,9.4 180 top
JP39  [1X01_ALLIGATOR_3MM_HALF]  83.19,9.4 180 top
JP40  [JST-3-PTH-VERT]  103.38,16.76 0 top
JP41  [1X01_NO_SILK]  98.42,13.84 0 top
JP42  [1X01_NO_SILK]  83.19,41.78 0 top
JP43  [1X01_NO_SILK]  78.11,13.84 0 top
JP44  [1X01_NO_SILK]  83.19,13.84 0 top
JP45  [1X01_NO_SILK]  93.34,41.78 0 top
JP46  [1X01_NO_SILK]  88.27,41.78 0 top
JP47  [1X01_NO_SILK]  78.11,41.78 0 top
JP48  [1X01_NO_SILK]  73.03,41.78 0 top
JP49  LiPo  [JST-2-PTH]  71.12,19.56 90 top
JP50  [1X01_NO_SILK]  95.89,41.78 0 top
JP51  [1X01_ALLIGATOR_3MM_HALF]  93.34,9.4 180 top
JP52  [1X01_NO_SILK]  93.34,13.84 0 top
JP53  [1X01_ALLIGATOR_3MM_HALF]  88.27,9.4 180 top
JP54  [1X01_NO_SILK]  88.27,13.84 0 top
JP55  [1X01_ALLIGATOR_3MM_HALF]  98.42,46.23 0 top
JP56  [1X01_NO_SILK]  98.42,41.78 0 top
JP57  [1X01_ALLIGATOR_3MM_HALF]  73.03,9.4 180 top
JP58  [1X01_NO_SILK]  73.03,13.84 0 top
JP59  [1X04_NO_SILK]  66.04,34.8 90 top
JP60  [JST-4-PTH-VERT]  69.6,38.23 90 top
JP61  [USB-B-MICRO-SMD_V03]  121.41,27.81 0 top
JP62  [1X01_ALLIGATOR_3MM_HALF]  127.64,46.23 0 top
JP63  [1X01_ALLIGATOR_3MM_HALF]  132.72,46.23 0 top
JP64  [1X01_ALLIGATOR_3MM_HALF]  142.88,46.23 0 top
JP65  [1X01_ALLIGATOR_3MM_HALF]  147.96,46.23 0 top
JP66  [1X01_ALLIGATOR_3MM_HALF]  153.03,9.4 180 top
JP67  [1X01_ALLIGATOR_3MM_HALF]  137.79,46.23 0 top
JP68  [1X01_ALLIGATOR_3MM_HALF]  132.72,9.4 180 top
JP69  [1X01_ALLIGATOR_3MM_HALF]  137.79,9.4 180 top
JP70  [JST-3-PTH-VERT]  157.99,16.76 0 top
JP71  [1X01_NO_SILK]  153.03,13.84 0 top
JP72  [1X01_NO_SILK]  137.79,41.78 0 top
JP73  [1X01_NO_SILK]  132.72,13.84 0 top
JP74  [1X01_NO_SILK]  137.79,13.84 0 top
JP75  [1X01_NO_SILK]  147.96,41.78 0 top
JP76  [1X01_NO_SILK]  142.88,41.78 0 top
JP77  [1X01_NO_SILK]  132.72,41.78 0 top
JP78  [1X01_NO_SILK]  127.64,41.78 0 top
JP79  LiPo  [JST-2-PTH]  125.73,19.56 90 top
JP80  [1X01_NO_SILK]  150.5,41.78 0 top
JP81  [1X01_ALLIGATOR_3MM_HALF]  147.96,9.4 180 top
JP82  [1X01_NO_SILK]  147.96,13.84 0 top
JP83  [1X01_ALLIGATOR_3MM_HALF]  142.88,9.4 180 top
JP84  [1X01_NO_SILK]  142.88,13.84 0 top
JP85  [1X01_ALLIGATOR_3MM_HALF]  153.03,46.23 0 top
JP86  [1X01_NO_SILK]  153.03,41.78 0 top
JP87  [1X01_ALLIGATOR_3MM_HALF]  127.64,9.4 180 top
JP88  [1X01_NO_SILK]  127.64,13.84 0 top
JP89  [1X04_NO_SILK]  120.65,34.8 90 top
JP90  [JST-4-PTH-VERT]  124.21,38.23 90 top
JP91  [USB-B-MICRO-SMD_V03]  176.02,27.81 0 top
JP92  [1X01_ALLIGATOR_3MM_HALF]  182.25,46.23 0 top
JP93  [1X01_ALLIGATOR_3MM_HALF]  187.32,46.23 0 top
JP94  [1X01_ALLIGATOR_3MM_HALF]  197.49,46.23 0 top
JP95  [1X01_ALLIGATOR_3MM_HALF]  202.56,46.23 0 top
JP96  [1X01_ALLIGATOR_3MM_HALF]  207.65,9.4 180 top
JP97  [1X01_ALLIGATOR_3MM_HALF]  192.41,46.23 0 top
JP98  [1X01_ALLIGATOR_3MM_HALF]  187.32,9.4 180 top
JP99  [1X01_ALLIGATOR_3MM_HALF]  192.41,9.4 180 top
JP100  [JST-3-PTH-VERT]  212.6,16.76 0 top
JP101  [1X01_NO_SILK]  207.65,13.84 0 top
JP102  [1X01_NO_SILK]  192.41,41.78 0 top
JP103  [1X01_NO_SILK]  187.32,13.84 0 top
JP104  [1X01_NO_SILK]  192.41,13.84 0 top
JP105  [1X01_NO_SILK]  202.56,41.78 0 top
JP106  [1X01_NO_SILK]  197.49,41.78 0 top
JP107  [1X01_NO_SILK]  187.32,41.78 0 top
JP108  [1X01_NO_SILK]  182.25,41.78 0 top
JP109  LiPo  [JST-2-PTH]  180.34,19.56 90 top
JP110  [1X01_NO_SILK]  205.1,41.78 0 top
JP111  [1X01_ALLIGATOR_3MM_HALF]  202.56,9.4 180 top
JP112  [1X01_NO_SILK]  202.56,13.84 0 top
JP113  [1X01_ALLIGATOR_3MM_HALF]  197.49,9.4 180 top
JP114  [1X01_NO_SILK]  197.49,13.84 0 top
JP115  [1X01_ALLIGATOR_3MM_HALF]  207.65,46.23 0 top
JP116  [1X01_NO_SILK]  207.65,41.78 0 top
JP117  [1X01_ALLIGATOR_3MM_HALF]  182.25,9.4 180 top
JP118  [1X01_NO_SILK]  182.25,13.84 0 top
JP119  [1X04_NO_SILK]  175.26,34.8 90 top
JP120  [JST-4-PTH-VERT]  178.82,38.23 90 top
JP121  [USB-B-MICRO-SMD_V03]  230.63,27.81 0 top
JP122  [1X01_ALLIGATOR_3MM_HALF]  236.85,46.23 0 top
JP123  [1X01_ALLIGATOR_3MM_HALF]  241.94,46.23 0 top
JP124  [1X01_ALLIGATOR_3MM_HALF]  252.09,46.23 0 top
JP125  [1X01_ALLIGATOR_3MM_HALF]  257.18,46.23 0 top
JP126  [1X01_ALLIGATOR_3MM_HALF]  262.25,9.4 180 top
JP127  [1X01_ALLIGATOR_3MM_HALF]  247.01,46.23 0 top
JP128  [1X01_ALLIGATOR_3MM_HALF]  241.94,9.4 180 top
JP129  [1X01_ALLIGATOR_3MM_HALF]  247.01,9.4 180 top
JP130  [JST-3-PTH-VERT]  267.21,16.76 0 top
JP131  [1X01_NO_SILK]  262.25,13.84 0 top
JP132  [1X01_NO_SILK]  247.01,41.78 0 top
JP133  [1X01_NO_SILK]  241.94,13.84 0 top
JP134  [1X01_NO_SILK]  247.01,13.84 0 top
JP135  [1X01_NO_SILK]  257.18,41.78 0 top
JP136  [1X01_NO_SILK]  252.09,41.78 0 top
JP137  [1X01_NO_SILK]  241.94,41.78 0 top
JP138  [1X01_NO_SILK]  236.85,41.78 0 top
JP139  LiPo  [JST-2-PTH]  234.95,19.56 90 top
JP140  [1X01_NO_SILK]  259.71,41.78 0 top
JP141  [1X01_ALLIGATOR_3MM_HALF]  257.18,9.4 180 top
JP142  [1X01_NO_SILK]  257.18,13.84 0 top
JP143  [1X01_ALLIGATOR_3MM_HALF]  252.09,9.4 180 top
JP144  [1X01_NO_SILK]  252.09,13.84 0 top
JP145  [1X01_ALLIGATOR_3MM_HALF]  262.25,46.23 0 top
JP146  [1X01_NO_SILK]  262.25,41.78 0 top
JP147  [1X01_ALLIGATOR_3MM_HALF]  236.85,9.4 180 top
JP148  [1X01_NO_SILK]  236.85,13.84 0 top
JP149  [1X04_NO_SILK]  229.87,34.8 90 top
JP150  [JST-4-PTH-VERT]  233.43,38.23 90 top
JP151  [USB-B-MICRO-SMD_V03]  12.19,70.23 0 top
JP152  [1X01_ALLIGATOR_3MM_HALF]  18.41,88.65 0 top
JP153  [1X01_ALLIGATOR_3MM_HALF]  23.5,88.65 0 top
JP154  [1X01_ALLIGATOR_3MM_HALF]  33.66,88.65 0 top
JP155  [1X01_ALLIGATOR_3MM_HALF]  38.73,88.65 0 top
JP156  [1X01_ALLIGATOR_3MM_HALF]  43.81,51.82 180 top
JP157  [1X01_ALLIGATOR_3MM_HALF]  28.57,88.65 0 top
JP158  [1X01_ALLIGATOR_3MM_HALF]  23.5,51.82 180 top
JP159  [1X01_ALLIGATOR_3MM_HALF]  28.57,51.82 180 top
JP160  [JST-3-PTH-VERT]  48.77,59.18 0 top
JP161  [1X01_NO_SILK]  43.81,56.26 0 top
JP162  [1X01_NO_SILK]  28.57,84.2 0 top
JP163  [1X01_NO_SILK]  23.5,56.26 0 top
JP164  [1X01_NO_SILK]  28.57,56.26 0 top
JP165  [1X01_NO_SILK]  38.73,84.2 0 top
JP166  [1X01_NO_SILK]  33.66,84.2 0 top
JP167  [1X01_NO_SILK]  23.5,84.2 0 top
JP168  [1X01_NO_SILK]  18.41,84.2 0 top
JP169  LiPo  [JST-2-PTH]  16.51,61.98 90 top
JP170  [1X01_NO_SILK]  41.27,84.2 0 top
JP171  [1X01_ALLIGATOR_3MM_HALF]  38.73,51.82 180 top
JP172  [1X01_NO_SILK]  38.73,56.26 0 top
JP173  [1X01_ALLIGATOR_3MM_HALF]  33.66,51.82 180 top
JP174  [1X01_NO_SILK]  33.66,56.26 0 top
JP175  [1X01_ALLIGATOR_3MM_HALF]  43.81,88.65 0 top
JP176  [1X01_NO_SILK]  43.81,84.2 0 top
JP177  [1X01_ALLIGATOR_3MM_HALF]  18.41,51.82 180 top
JP178  [1X01_NO_SILK]  18.41,56.26 0 top
JP179  [1X04_NO_SILK]  11.43,77.22 90 top
JP180  [JST-4-PTH-VERT]  14.99,80.64 90 top
JP181  [USB-B-MICRO-SMD_V03]  66.8,70.23 0 top
JP182  [1X01_ALLIGATOR_3MM_HALF]  73.03,88.65 0 top
JP183  [1X01_ALLIGATOR_3MM_HALF]  78.11,88.65 0 top
JP184  [1X01_ALLIGATOR_3MM_HALF]  88.27,88.65 0 top
JP185  [1X01_ALLIGATOR_3MM_HALF]  93.34,88.65 0 top
JP186  [1X01_ALLIGATOR_3MM_HALF]  98.42,51.82 180 top
JP187  [1X01_ALLIGATOR_3MM_HALF]  83.19,88.65 0 top
JP188  [1X01_ALLIGATOR_3MM_HALF]  78.11,51.82 180 top
JP189  [1X01_ALLIGATOR_3MM_HALF]  83.19,51.82 180 top
JP190  [JST-3-PTH-VERT]  103.38,59.18 0 top
JP191  [1X01_NO_SILK]  98.42,56.26 0 top
JP192  [1X01_NO_SILK]  83.19,84.2 0 top
JP193  [1X01_NO_SILK]  78.11,56.26 0 top
JP194  [1X01_NO_SILK]  83.19,56.26 0 top
JP195  [1X01_NO_SILK]  93.34,84.2 0 top
JP196  [1X01_NO_SILK]  88.27,84.2 0 top
JP197  [1X01_NO_SILK]  78.11,84.2 0 top
JP198  [1X01_NO_SILK]  73.03,84.2 0 top
JP199  LiPo  [JST-2-PTH]  71.12,61.98 90 top
JP200  [1X01_NO_SILK]  95.89,84.2 0 top
JP201  [1X01_ALLIGATOR_3MM_HALF]  93.34,51.82 180 top
JP202  [1X01_NO_SILK]  93.34,56.26 0 top
JP203  [1X01_ALLIGATOR_3MM_HALF]  88.27,51.82 180 top
JP204  [1X01_NO_SILK]  88.27,56.26 0 top
JP205  [1X01_ALLIGATOR_3MM_HALF]  98.42,88.65 0 top
JP206  [1X01_NO_SILK]  98.42,84.2 0 top
JP207  [1X01_ALLIGATOR_3MM_HALF]  73.03,51.82 180 top
JP208  [1X01_NO_SILK]  73.03,56.26 0 top
JP209  [1X04_NO_SILK]  66.04,77.22 90 top
JP210  [JST-4-PTH-VERT]  69.6,80.64 90 top
JP211  [USB-B-MICRO-SMD_V03]  121.41,70.23 0 top
JP212  [1X01_ALLIGATOR_3MM_HALF]  127.64,88.65 0 top
JP213  [1X01_ALLIGATOR_3MM_HALF]  132.72,88.65 0 top
JP214  [1X01_ALLIGATOR_3MM_HALF]  142.88,88.65 0 top
JP215  [1X01_ALLIGATOR_3MM_HALF]  147.96,88.65 0 top
JP216  [1X01_ALLIGATOR_3MM_HALF]  153.03,51.82 180 top
JP217  [1X01_ALLIGATOR_3MM_HALF]  137.79,88.65 0 top
JP218  [1X01_ALLIGATOR_3MM_HALF]  132.72,51.82 180 top
JP219  [1X01_ALLIGATOR_3MM_HALF]  137.79,51.82 180 top
JP220  [JST-3-PTH-VERT]  157.99,59.18 0 top
JP221  [1X01_NO_SILK]  153.03,56.26 0 top
JP222  [1X01_NO_SILK]  137.79,84.2 0 top
JP223  [1X01_NO_SILK]  132.72,56.26 0 top
JP224  [1X01_NO_SILK]  137.79,56.26 0 top
JP225  [1X01_NO_SILK]  147.96,84.2 0 top
JP226  [1X01_NO_SILK]  142.88,84.2 0 top
JP227  [1X01_NO_SILK]  132.72,84.2 0 top
JP228  [1X01_NO_SILK]  127.64,84.2 0 top
JP229  LiPo  [JST-2-PTH]  125.73,61.98 90 top
JP230  [1X01_NO_SILK]  150.5,84.2 0 top
JP231  [1X01_ALLIGATOR_3MM_HALF]  147.96,51.82 180 top
JP232  [1X01_NO_SILK]  147.96,56.26 0 top
JP233  [1X01_ALLIGATOR_3MM_HALF]  142.88,51.82 180 top
JP234  [1X01_NO_SILK]  142.88,56.26 0 top
JP235  [1X01_ALLIGATOR_3MM_HALF]  153.03,88.65 0 top
JP236  [1X01_NO_SILK]  153.03,84.2 0 top
JP237  [1X01_ALLIGATOR_3MM_HALF]  127.64,51.82 180 top
JP238  [1X01_NO_SILK]  127.64,56.26 0 top
JP239  [1X04_NO_SILK]  120.65,77.22 90 top
JP240  [JST-4-PTH-VERT]  124.21,80.64 90 top
JP241  [USB-B-MICRO-SMD_V03]  176.02,70.23 0 top
JP242  [1X01_ALLIGATOR_3MM_HALF]  182.25,88.65 0 top
JP243  [1X01_ALLIGATOR_3MM_HALF]  187.32,88.65 0 top
JP244  [1X01_ALLIGATOR_3MM_HALF]  197.49,88.65 0 top
JP245  [1X01_ALLIGATOR_3MM_HALF]  202.56,88.65 0 top
JP246  [1X01_ALLIGATOR_3MM_HALF]  207.65,51.82 180 top
JP247  [1X01_ALLIGATOR_3MM_HALF]  192.41,88.65 0 top
JP248  [1X01_ALLIGATOR_3MM_HALF]  187.32,51.82 180 top
JP249  [1X01_ALLIGATOR_3MM_HALF]  192.41,51.82 180 top
JP250  [JST-3-PTH-VERT]  212.6,59.18 0 top
JP251  [1X01_NO_SILK]  207.65,56.26 0 top
JP252  [1X01_NO_SILK]  192.41,84.2 0 top
JP253  [1X01_NO_SILK]  187.32,56.26 0 top
JP254  [1X01_NO_SILK]  192.41,56.26 0 top
JP255  [1X01_NO_SILK]  202.56,84.2 0 top
JP256  [1X01_NO_SILK]  197.49,84.2 0 top
JP257  [1X01_NO_SILK]  187.32,84.2 0 top
JP258  [1X01_NO_SILK]  182.25,84.2 0 top
JP259  LiPo  [JST-2-PTH]  180.34,61.98 90 top
JP260  [1X01_NO_SILK]  205.1,84.2 0 top
JP261  [1X01_ALLIGATOR_3MM_HALF]  202.56,51.82 180 top
JP262  [1X01_NO_SILK]  202.56,56.26 0 top
JP263  [1X01_ALLIGATOR_3MM_HALF]  197.49,51.82 180 top
JP264  [1X01_NO_SILK]  197.49,56.26 0 top
JP265  [1X01_ALLIGATOR_3MM_HALF]  207.65,88.65 0 top
JP266  [1X01_NO_SILK]  207.65,84.2 0 top
JP267  [1X01_ALLIGATOR_3MM_HALF]  182.25,51.82 180 top
JP268  [1X01_NO_SILK]  182.25,56.26 0 top
JP269  [1X04_NO_SILK]  175.26,77.22 90 top
JP270  [JST-4-PTH-VERT]  178.82,80.64 90 top
JP271  [USB-B-MICRO-SMD_V03]  230.63,70.23 0 top
JP272  [1X01_ALLIGATOR_3MM_HALF]  236.85,88.65 0 top
JP273  [1X01_ALLIGATOR_3MM_HALF]  241.94,88.65 0 top
JP274  [1X01_ALLIGATOR_3MM_HALF]  252.09,88.65 0 top
JP275  [1X01_ALLIGATOR_3MM_HALF]  257.18,88.65 0 top
JP276  [1X01_ALLIGATOR_3MM_HALF]  262.25,51.82 180 top
JP277  [1X01_ALLIGATOR_3MM_HALF]  247.01,88.65 0 top
JP278  [1X01_ALLIGATOR_3MM_HALF]  241.94,51.82 180 top
JP279  [1X01_ALLIGATOR_3MM_HALF]  247.01,51.82 180 top
JP280  [JST-3-PTH-VERT]  267.21,59.18 0 top
JP281  [1X01_NO_SILK]  262.25,56.26 0 top
JP282  [1X01_NO_SILK]  247.01,84.2 0 top
JP283  [1X01_NO_SILK]  241.94,56.26 0 top
JP284  [1X01_NO_SILK]  247.01,56.26 0 top
JP285  [1X01_NO_SILK]  257.18,84.2 0 top
JP286  [1X01_NO_SILK]  252.09,84.2 0 top
JP287  [1X01_NO_SILK]  241.94,84.2 0 top
JP288  [1X01_NO_SILK]  236.85,84.2 0 top
JP289  LiPo  [JST-2-PTH]  234.95,61.98 90 top
JP290  [1X01_NO_SILK]  259.71,84.2 0 top
JP291  [1X01_ALLIGATOR_3MM_HALF]  257.18,51.82 180 top
JP292  [1X01_NO_SILK]  257.18,56.26 0 top
JP293  [1X01_ALLIGATOR_3MM_HALF]  252.09,51.82 180 top
JP294  [1X01_NO_SILK]  252.09,56.26 0 top
JP295  [1X01_ALLIGATOR_3MM_HALF]  262.25,88.65 0 top
JP296  [1X01_NO_SILK]  262.25,84.2 0 top
JP297  [1X01_ALLIGATOR_3MM_HALF]  236.85,51.82 180 top
JP298  [1X01_NO_SILK]  236.85,56.26 0 top
JP299  [1X04_NO_SILK]  229.87,77.22 90 top
JP300  [JST-4-PTH-VERT]  233.43,80.64 90 top
JP301  [USB-B-MICRO-SMD_V03]  12.19,112.65 0 top
JP302  [1X01_ALLIGATOR_3MM_HALF]  18.41,131.06 0 top
JP303  [1X01_ALLIGATOR_3MM_HALF]  23.5,131.06 0 top
JP304  [1X01_ALLIGATOR_3MM_HALF]  33.66,131.06 0 top
JP305  [1X01_ALLIGATOR_3MM_HALF]  38.73,131.06 0 top
JP306  [1X01_ALLIGATOR_3MM_HALF]  43.81,94.23 180 top
JP307  [1X01_ALLIGATOR_3MM_HALF]  28.57,131.06 0 top
JP308  [1X01_ALLIGATOR_3MM_HALF]  23.5,94.23 180 top
JP309  [1X01_ALLIGATOR_3MM_HALF]  28.57,94.23 180 top
JP310  [JST-3-PTH-VERT]  48.77,101.6 0 top
JP311  [1X01_NO_SILK]  43.81,98.68 0 top
JP312  [1X01_NO_SILK]  28.57,126.62 0 top
JP313  [1X01_NO_SILK]  23.5,98.68 0 top
JP314  [1X01_NO_SILK]  28.57,98.68 0 top
JP315  [1X01_NO_SILK]  38.73,126.62 0 top
JP316  [1X01_NO_SILK]  33.66,126.62 0 top
JP317  [1X01_NO_SILK]  23.5,126.62 0 top
JP318  [1X01_NO_SILK]  18.41,126.62 0 top
JP319  LiPo  [JST-2-PTH]  16.51,104.39 90 top
JP320  [1X01_NO_SILK]  41.27,126.62 0 top
JP321  [1X01_ALLIGATOR_3MM_HALF]  38.73,94.23 180 top
JP322  [1X01_NO_SILK]  38.73,98.68 0 top
JP323  [1X01_ALLIGATOR_3MM_HALF]  33.66,94.23 180 top
JP324  [1X01_NO_SILK]  33.66,98.68 0 top
JP325  [1X01_ALLIGATOR_3MM_HALF]  43.81,131.06 0 top
JP326  [1X01_NO_SILK]  43.81,126.62 0 top
JP327  [1X01_ALLIGATOR_3MM_HALF]  18.41,94.23 180 top
JP328  [1X01_NO_SILK]  18.41,98.68 0 top
JP329  [1X04_NO_SILK]  11.43,119.63 90 top
JP330  [JST-4-PTH-VERT]  14.99,123.06 90 top
JP331  [USB-B-MICRO-SMD_V03]  66.8,112.65 0 top
JP332  [1X01_ALLIGATOR_3MM_HALF]  73.03,131.06 0 top
JP333  [1X01_ALLIGATOR_3MM_HALF]  78.11,131.06 0 top
JP334  [1X01_ALLIGATOR_3MM_HALF]  88.27,131.06 0 top
JP335  [1X01_ALLIGATOR_3MM_HALF]  93.34,131.06 0 top
JP336  [1X01_ALLIGATOR_3MM_HALF]  98.42,94.23 180 top
JP337  [1X01_ALLIGATOR_3MM_HALF]  83.19,131.06 0 top
JP338  [1X01_ALLIGATOR_3MM_HALF]  78.11,94.23 180 top
JP339  [1X01_ALLIGATOR_3MM_HALF]  83.19,94.23 180 top
JP340  [JST-3-PTH-VERT]  103.38,101.6 0 top
JP341  [1X01_NO_SILK]  98.42,98.68 0 top
JP342  [1X01_NO_SILK]  83.19,126.62 0 top
JP343  [1X01_NO_SILK]  78.11,98.68 0 top
JP344  [1X01_NO_SILK]  83.19,98.68 0 top
JP345  [1X01_NO_SILK]  93.34,126.62 0 top
JP346  [1X01_NO_SILK]  88.27,126.62 0 top
JP347  [1X01_NO_SILK]  78.11,126.62 0 top
JP348  [1X01_NO_SILK]  73.03,126.62 0 top
JP349  LiPo  [JST-2-PTH]  71.12,104.39 90 top
JP350  [1X01_NO_SILK]  95.89,126.62 0 top
JP351  [1X01_ALLIGATOR_3MM_HALF]  93.34,94.23 180 top
JP352  [1X01_NO_SILK]  93.34,98.68 0 top
JP353  [1X01_ALLIGATOR_3MM_HALF]  88.27,94.23 180 top
JP354  [1X01_NO_SILK]  88.27,98.68 0 top
JP355  [1X01_ALLIGATOR_3MM_HALF]  98.42,131.06 0 top
JP356  [1X01_NO_SILK]  98.42,126.62 0 top
JP357  [1X01_ALLIGATOR_3MM_HALF]  73.03,94.23 180 top
JP358  [1X01_NO_SILK]  73.03,98.68 0 top
JP359  [1X04_NO_SILK]  66.04,119.63 90 top
JP360  [JST-4-PTH-VERT]  69.6,123.06 90 top
JP361  [USB-B-MICRO-SMD_V03]  121.41,112.65 0 top
JP362  [1X01_ALLIGATOR_3MM_HALF]  127.64,131.06 0 top
JP363  [1X01_ALLIGATOR_3MM_HALF]  132.72,131.06 0 top
JP364  [1X01_ALLIGATOR_3MM_HALF]  142.88,131.06 0 top
JP365  [1X01_ALLIGATOR_3MM_HALF]  147.96,131.06 0 top
JP366  [1X01_ALLIGATOR_3MM_HALF]  153.03,94.23 180 top
JP367  [1X01_ALLIGATOR_3MM_HALF]  137.79,131.06 0 top
JP368  [1X01_ALLIGATOR_3MM_HALF]  132.72,94.23 180 top
JP369  [1X01_ALLIGATOR_3MM_HALF]  137.79,94.23 180 top
JP370  [JST-3-PTH-VERT]  157.99,101.6 0 top
JP371  [1X01_NO_SILK]  153.03,98.68 0 top
JP372  [1X01_NO_SILK]  137.79,126.62 0 top
JP373  [1X01_NO_SILK]  132.72,98.68 0 top
JP374  [1X01_NO_SILK]  137.79,98.68 0 top
JP375  [1X01_NO_SILK]  147.96,126.62 0 top
JP376  [1X01_NO_SILK]  142.88,126.62 0 top
JP377  [1X01_NO_SILK]  132.72,126.62 0 top
JP378  [1X01_NO_SILK]  127.64,126.62 0 top
JP379  LiPo  [JST-2-PTH]  125.73,104.39 90 top
JP380  [1X01_NO_SILK]  150.5,126.62 0 top
JP381  [1X01_ALLIGATOR_3MM_HALF]  147.96,94.23 180 top
JP382  [1X01_NO_SILK]  147.96,98.68 0 top
JP383  [1X01_ALLIGATOR_3MM_HALF]  142.88,94.23 180 top
JP384  [1X01_NO_SILK]  142.88,98.68 0 top
JP385  [1X01_ALLIGATOR_3MM_HALF]  153.03,131.06 0 top
JP386  [1X01_NO_SILK]  153.03,126.62 0 top
JP387  [1X01_ALLIGATOR_3MM_HALF]  127.64,94.23 180 top
JP388  [1X01_NO_SILK]  127.64,98.68 0 top
JP389  [1X04_NO_SILK]  120.65,119.63 90 top
JP390  [JST-4-PTH-VERT]  124.21,123.06 90 top
JP391  [USB-B-MICRO-SMD_V03]  176.02,112.65 0 top
JP392  [1X01_ALLIGATOR_3MM_HALF]  182.25,131.06 0 top
JP393  [1X01_ALLIGATOR_3MM_HALF]  187.32,131.06 0 top
JP394  [1X01_ALLIGATOR_3MM_HALF]  197.49,131.06 0 top
JP395  [1X01_ALLIGATOR_3MM_HALF]  202.56,131.06 0 top
JP396  [1X01_ALLIGATOR_3MM_HALF]  207.65,94.23 180 top
JP397  [1X01_ALLIGATOR_3MM_HALF]  192.41,131.06 0 top
JP398  [1X01_ALLIGATOR_3MM_HALF]  187.32,94.23 180 top
JP399  [1X01_ALLIGATOR_3MM_HALF]  192.41,94.23 180 top
JP400  [JST-3-PTH-VERT]  212.6,101.6 0 top
JP401  [1X01_NO_SILK]  207.65,98.68 0 top
JP402  [1X01_NO_SILK]  192.41,126.62 0 top
JP403  [1X01_NO_SILK]  187.32,98.68 0 top
JP404  [1X01_NO_SILK]  192.41,98.68 0 top
JP405  [1X01_NO_SILK]  202.56,126.62 0 top
JP406  [1X01_NO_SILK]  197.49,126.62 0 top
JP407  [1X01_NO_SILK]  187.32,126.62 0 top
JP408  [1X01_NO_SILK]  182.25,126.62 0 top
JP409  LiPo  [JST-2-PTH]  180.34,104.39 90 top
JP410  [1X01_NO_SILK]  205.1,126.62 0 top
JP411  [1X01_ALLIGATOR_3MM_HALF]  202.56,94.23 180 top
JP412  [1X01_NO_SILK]  202.56,98.68 0 top
JP413  [1X01_ALLIGATOR_3MM_HALF]  197.49,94.23 180 top
JP414  [1X01_NO_SILK]  197.49,98.68 0 top
JP415  [1X01_ALLIGATOR_3MM_HALF]  207.65,131.06 0 top
JP416  [1X01_NO_SILK]  207.65,126.62 0 top
JP417  [1X01_ALLIGATOR_3MM_HALF]  182.25,94.23 180 top
JP418  [1X01_NO_SILK]  182.25,98.68 0 top
JP419  [1X04_NO_SILK]  175.26,119.63 90 top
JP420  [JST-4-PTH-VERT]  178.82,123.06 90 top
JP421  [USB-B-MICRO-SMD_V03]  230.63,112.65 0 top
JP422  [1X01_ALLIGATOR_3MM_HALF]  236.85,131.06 0 top
JP423  [1X01_ALLIGATOR_3MM_HALF]  241.94,131.06 0 top
JP424  [1X01_ALLIGATOR_3MM_HALF]  252.09,131.06 0 top
JP425  [1X01_ALLIGATOR_3MM_HALF]  257.18,131.06 0 top
JP426  [1X01_ALLIGATOR_3MM_HALF]  262.25,94.23 180 top
JP427  [1X01_ALLIGATOR_3MM_HALF]  247.01,131.06 0 top
JP428  [1X01_ALLIGATOR_3MM_HALF]  241.94,94.23 180 top
JP429  [1X01_ALLIGATOR_3MM_HALF]  247.01,94.23 180 top
JP430  [JST-3-PTH-VERT]  267.21,101.6 0 top
JP431  [1X01_NO_SILK]  262.25,98.68 0 top
JP432  [1X01_NO_SILK]  247.01,126.62 0 top
JP433  [1X01_NO_SILK]  241.94,98.68 0 top
JP434  [1X01_NO_SILK]  247.01,98.68 0 top
JP435  [1X01_NO_SILK]  257.18,126.62 0 top
JP436  [1X01_NO_SILK]  252.09,126.62 0 top
JP437  [1X01_NO_SILK]  241.94,126.62 0 top
JP438  [1X01_NO_SILK]  236.85,126.62 0 top
JP439  LiPo  [JST-2-PTH]  234.95,104.39 90 top
JP440  [1X01_NO_SILK]  259.71,126.62 0 top
JP441  [1X01_ALLIGATOR_3MM_HALF]  257.18,94.23 180 top
JP442  [1X01_NO_SILK]  257.18,98.68 0 top
JP443  [1X01_ALLIGATOR_3MM_HALF]  252.09,94.23 180 top
JP444  [1X01_NO_SILK]  252.09,98.68 0 top
JP445  [1X01_ALLIGATOR_3MM_HALF]  262.25,131.06 0 top
JP446  [1X01_NO_SILK]  262.25,126.62 0 top
JP447  [1X01_ALLIGATOR_3MM_HALF]  236.85,94.23 180 top
JP448  [1X01_NO_SILK]  236.85,98.68 0 top
JP449  [1X04_NO_SILK]  229.87,119.63 90 top
JP450  [JST-4-PTH-VERT]  233.43,123.06 90 top
L1  DNP  [0603]  45.09,28.89 270 top
L2  DNP  [0603]  50.16,28.89 270 top
L3  DNP  [0603]  99.69,28.89 270 top
L4  DNP  [0603]  104.78,28.89 270 top
L5  DNP  [0603]  154.31,28.89 270 top
L6  DNP  [0603]  159.38,28.89 270 top
L7  DNP  [0603]  208.91,28.89 270 top
L8  DNP  [0603]  214,28.89 270 top
L9  DNP  [0603]  263.52,28.89 270 top
L10  DNP  [0603]  268.61,28.89 270 top
L11  DNP  [0603]  45.09,71.31 270 top
L12  DNP  [0603]  50.16,71.31 270 top
L13  DNP  [0603]  99.69,71.31 270 top
L14  DNP  [0603]  104.78,71.31 270 top
L15  DNP  [0603]  154.31,71.31 270 top
L16  DNP  [0603]  159.38,71.31 270 top
L17  DNP  [0603]  208.91,71.31 270 top
L18  DNP  [0603]  214,71.31 270 top
L19  DNP  [0603]  263.52,71.31 270 top
L20  DNP  [0603]  268.61,71.31 270 top
L21  DNP  [0603]  45.09,113.73 270 top
L22  DNP  [0603]  50.16,113.73 270 top
L23  DNP  [0603]  99.69,113.73 270 top
L24  DNP  [0603]  104.78,113.73 270 top
L25  DNP  [0603]  154.31,113.73 270 top
L26  DNP  [0603]  159.38,113.73 270 top
L27  DNP  [0603]  208.91,113.73 270 top
L28  DNP  [0603]  214,113.73 270 top
L29  DNP  [0603]  263.52,113.73 270 top
L30  DNP  [0603]  268.61,113.73 270 top
LOGO1  SFE_LOGO_NAME.2_INCH  [SFE_LOGO_NAME_.2]  57.78,16.83 90 top
LOGO2  OSHW-LOGOS  [OSHW-LOGO-S]  49.53,32.89 90 top
LOGO3  SFE_LOGO_NAME.3_INCH  [SFE_LOGO_NAME_.3]  49.53,24.64 0 bottom
LOGO4  SFE_LOGO_NAME.2_INCH  [SFE_LOGO_NAME_.2]  112.39,16.83 90 top
LOGO5  OSHW-LOGOS  [OSHW-LOGO-S]  104.14,32.89 90 top
LOGO6  SFE_LOGO_NAME.3_INCH  [SFE_LOGO_NAME_.3]  104.14,24.64 0 bottom
LOGO7  SFE_LOGO_NAME.2_INCH  [SFE_LOGO_NAME_.2]  167,16.83 90 top
LOGO8  OSHW-LOGOS  [OSHW-LOGO-S]  158.75,32.89 90 top
LOGO9  SFE_LOGO_NAME.3_INCH  [SFE_LOGO_NAME_.3]  158.75,24.64 0 bottom
LOGO10  SFE_LOGO_NAME.2_INCH  [SFE_LOGO_NAME_.2]  221.62,16.83 90 top
LOGO11  OSHW-LOGOS  [OSHW-LOGO-S]  213.36,32.89 90 top
LOGO12  SFE_LOGO_NAME.3_INCH  [SFE_LOGO_NAME_.3]  213.36,24.64 0 bottom
LOGO13  SFE_LOGO_NAME.2_INCH  [SFE_LOGO_NAME_.2]  276.23,16.83 90 top
LOGO14  OSHW-LOGOS  [OSHW-LOGO-S]  267.97,32.89 90 top
LOGO15  SFE_LOGO_NAME.3_INCH  [SFE_LOGO_NAME_.3]  267.97,24.64 0 bottom
LOGO16  SFE_LOGO_NAME.2_INCH  [SFE_LOGO_NAME_.2]  57.78,59.25 90 top
LOGO17  OSHW-LOGOS  [OSHW-LOGO-S]  49.53,75.31 90 top
LOGO18  SFE_LOGO_NAME.3_INCH  [SFE_LOGO_NAME_.3]  49.53,67.06 0 bottom
LOGO19  SFE_LOGO_NAME.2_INCH  [SFE_LOGO_NAME_.2]  112.39,59.25 90 top
LOGO20  OSHW-LOGOS  [OSHW-LOGO-S]  104.14,75.31 90 top
LOGO21  SFE_LOGO_NAME.3_INCH  [SFE_LOGO_NAME_.3]  104.14,67.06 0 bottom
LOGO22  SFE_LOGO_NAME.2_INCH  [SFE_LOGO_NAME_.2]  167,59.25 90 top
LOGO23  OSHW-LOGOS  [OSHW-LOGO-S]  158.75,75.31 90 top
LOGO24  SFE_LOGO_NAME.3_INCH  [SFE_LOGO_NAME_.3]  158.75,67.06 0 bottom
LOGO25  SFE_LOGO_NAME.2_INCH  [SFE_LOGO_NAME_.2]  221.62,59.25 90 top
LOGO26  OSHW-LOGOS  [OSHW-LOGO-S]  213.36,75.31 90 top
LOGO27  SFE_LOGO_NAME.3_INCH  [SFE_LOGO_NAME_.3]  213.36,67.06 0 bottom
LOGO28  SFE_LOGO_NAME.2_INCH  [SFE_LOGO_NAME_.2]  276.23,59.25 90 top
LOGO29  OSHW-LOGOS  [OSHW-LOGO-S]  267.97,75.31 90 top
LOGO30  SFE_LOGO_NAME.3_INCH  [SFE_LOGO_NAME_.3]  267.97,67.06 0 bottom
LOGO31  SFE_LOGO_NAME.2_INCH  [SFE_LOGO_NAME_.2]  57.78,101.66 90 top
LOGO32  OSHW-LOGOS  [OSHW-LOGO-S]  49.53,117.73 90 top
LOGO33  SFE_LOGO_NAME.3_INCH  [SFE_LOGO_NAME_.3]  49.53,109.47 0 bottom
LOGO34  SFE_LOGO_NAME.2_INCH  [SFE_LOGO_NAME_.2]  112.39,101.66 90 top
LOGO35  OSHW-LOGOS  [OSHW-LOGO-S]  104.14,117.73 90 top
LOGO36  SFE_LOGO_NAME.3_INCH  [SFE_LOGO_NAME_.3]  104.14,109.47 0 bottom
LOGO37  SFE_LOGO_NAME.2_INCH  [SFE_LOGO_NAME_.2]  167,101.66 90 top
LOGO38  OSHW-LOGOS  [OSHW-LOGO-S]  158.75,117.73 90 top
LOGO39  SFE_LOGO_NAME.3_INCH  [SFE_LOGO_NAME_.3]  158.75,109.47 0 bottom
LOGO40  SFE_LOGO_NAME.2_INCH  [SFE_LOGO_NAME_.2]  221.62,101.66 90 top
LOGO41  OSHW-LOGOS  [OSHW-LOGO-S]  213.36,117.73 90 top
LOGO42  SFE_LOGO_NAME.3_INCH  [SFE_LOGO_NAME_.3]  213.36,109.47 0 bottom
LOGO43  SFE_LOGO_NAME.2_INCH  [SFE_LOGO_NAME_.2]  276.23,101.66 90 top
LOGO44  OSHW-LOGOS  [OSHW-LOGO-S]  267.97,117.73 90 top
LOGO45  SFE_LOGO_NAME.3_INCH  [SFE_LOGO_NAME_.3]  267.97,109.47 0 bottom
Q1  2.5A/30V  [SOT23-3]  24.13,21.46 180 top
Q2  MMBT2222A  [SOT23-3@1]  38.1,20.83 0 top
Q3  MMBT2222A  [SOT23-3@1]  41.91,20.83 0 top
Q4  MMBT2222A  [SOT23-3@1]  92.71,20.83 0 top
Q5  MMBT2222A  [SOT23-3@1]  96.52,20.83 0 top
Q6  2.5A/30V  [SOT23-3]  78.74,21.46 180 top
Q7  MMBT2222A  [SOT23-3@1]  147.32,20.83 0 top
Q8  MMBT2222A  [SOT23-3@1]  151.13,20.83 0 top
Q9  2.5A/30V  [SOT23-3]  133.35,21.46 180 top
Q10  MMBT2222A  [SOT23-3@1]  201.93,20.83 0 top
Q11  MMBT2222A  [SOT23-3@1]  205.74,20.83 0 top
Q12  2.5A/30V  [SOT23-3]  187.96,21.46 180 top
Q13  MMBT2222A  [SOT23-3@1]  256.54,20.83 0 top
Q14  MMBT2222A  [SOT23-3@1]  260.35,20.83 0 top
Q15  2.5A/30V  [SOT23-3]  242.57,21.46 180 top